# EAGLE board growth_panel (EAGLE 9.5.0)
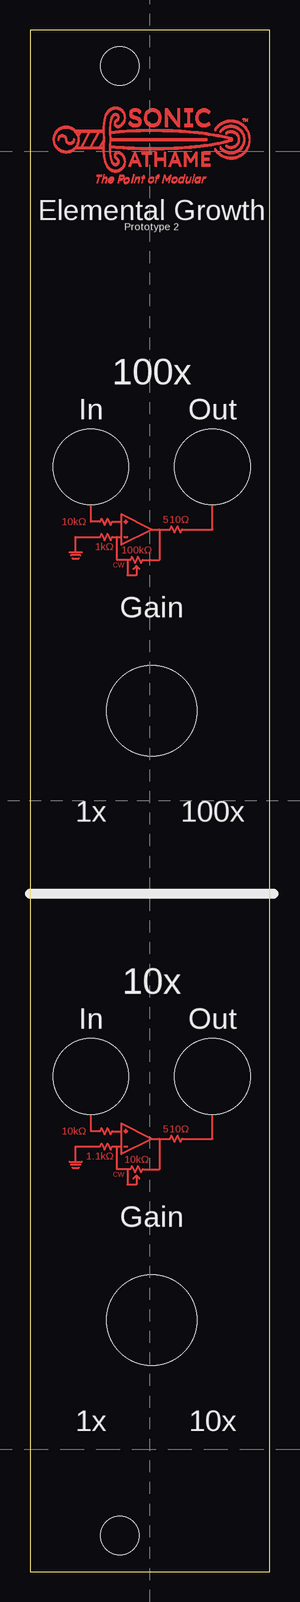
[diagram p0: board, top side]

Size 20 x 128.5 mm. Coordinates in mm from the lower left corner, seen from the top.
Copper layers (1*16): Top 0.035mm / dielectric 1.5mm / Bottom 0.035mm
Design rules "default": minimum track width 6mil, minimum drill 0.35mm, track to track 6mil, track to pad 6mil, pad to pad 6mil, via to via 6mil, smd to smd 6mil, copper to edge 40mil, drill to drill 6mil, minimum pad ring 10mil, minimum via ring 8mil, stop-mask expansion 4mil, vias tented up to drill 0mil, thermal gap 10mil

## Footprints (pad centres in the part's own frame; a part is rotated, then mirrored left to right if it is on the bottom)
PANEL_4U = hole 3.2: 7.5,3; 7.5,125.5
WQP-PJ398SM_PANEL = hole 6.3: 0,0
ALPHA_POT_VERTICAL_PANEL = hole 7.5: 0,0

## Placement (x,y rotation side)
U$1  [PANEL_4U]  0,0 0 top
U$2  [WQP-PJ398SM_PANEL]  5.08,92.08 0 top
U$3  [WQP-PJ398SM_PANEL]  15.24,92.08 0 top
U$4  [WQP-PJ398SM_PANEL]  5.08,41.27 0 top
U$5  [WQP-PJ398SM_PANEL]  15.24,41.27 0 top
U$6  [ALPHA_POT_VERTICAL_PANEL]  10.16,71.75 0 top
U$7  [ALPHA_POT_VERTICAL_PANEL]  10.16,20.95 0 top
U$8  [LOGO-65MIL-TPAD]  10.16,119.38 0 top

## Library data of the parts
U$1-U$8 = SonicAthame

## Tracks (layer width: path | path; a pad name or v marks a point on that pad's centre or on a via)
N$107
  Top 0.152: 5.08,90.04 5.08,87.5
N$108
  Top 0.152: 7.62,87.5 7.62,86.23
N$109
  Top 0.152: 5.97,87.76 6.22,87.25
N$110
  Top 0.152: 7.62,88.14 7.62,87.5
N$111
  Top 0.152: 10.16,86.87 7.62,88.14
N$112
  Top 0.152: 8.89,83.82 8.89,83.06
N$113
  Top 0.152: 12.06,86.61 12.32,87.12
N$114
  Top 0.152: 7.62,86.23 7.62,85.6
N$115
  Top 0.152: 7.62,85.6 10.16,86.87
N$116
  Top 0.152: 7.87,87.5 8.13,87.5
N$117
  Top 0.152: 11.68,86.87 11.81,87.12
N$118
  Top 0.152: 8.13,84.33 7.24,84.33
N$119
  Top 0.152: 8,87.38 8,87.63
N$120
  Top 0.152: 7.87,86.23 8.13,86.23
N$121
  Top 0.152: 3.3,84.96 3.81,84.96
N$122
  Top 0.152: 6.73,87.25 6.86,87.5
N$123
  Top 0.152: 8.38,84.33 8.13,84.33
N$124
  Top 0.152: 3.81,84.96 4.32,84.96
N$125
  Top 0.152: 4.19,84.71 3.43,84.71
N$126
  Top 0.152: 11.81,87.12 12.06,86.61
N$127
  Top 0.152: 3.56,84.45 4.06,84.45
N$128
  Top 0.152: 5.84,86.23 5.97,86.49
N$129
  Top 0.152: 5.97,86.49 6.22,85.98
N$130
  Top 0.152: 6.22,85.98 6.48,86.49
N$131
  Top 0.152: 3.81,84.96 3.81,86.23
N$132
  Top 0.152: 6.48,86.49 6.73,85.98
N$133
  Top 0.152: 6.73,85.98 6.86,86.23
N$134
  Top 0.152: 5.84,87.5 5.97,87.76
N$135
  Top 0.152: 6.22,87.25 6.48,87.76
N$136
  Top 0.152: 6.48,87.76 6.73,87.25
N$137
  Top 0.152: 5.84,87.5 5.08,87.5
N$138
  Top 0.152: 9.4,84.33 10.79,84.33
N$139
  Top 0.152: 6.86,87.5 7.62,87.5
N$140
  Top 0.152: 12.32,87.12 12.57,86.61
N$141
  Top 0.152: 12.57,86.61 12.7,86.87
N$142
  Top 0.152: 8.38,84.33 8.51,84.58
N$143
  Top 0.152: 8.51,84.58 8.76,84.07
N$144
  Top 0.152: 8.13,83.06 8.89,83.06
N$145
  Top 0.152: 8.76,84.07 9.02,84.58
N$146
  Top 0.152: 9.02,84.58 9.27,84.07
N$147
  Top 0.152: 8.89,83.82 8.64,83.57
N$148
  Top 0.152: 9.27,84.07 9.4,84.33
N$149
  Top 0.152: 7.24,86.23 7.24,84.33
N$150
  Top 0.152: 10.16,86.87 10.79,86.87
N$151
  Top 0.152: 7.24,86.23 7.62,86.23
N$152
  Top 0.152: 10.79,86.87 11.68,86.87
N$153
  Top 0.152: 12.7,86.87 15.24,86.87
N$154
  Top 0.152: 15.24,86.87 15.24,90.04
N$155
  Top 0.152: 10.79,86.87 10.79,84.33
N$156
  Top 0.152: 8.89,83.82 9.14,83.57
N$157
  Top 0.152: 6.86,86.23 7.24,86.23
N$158
  Top 0.152: 3.81,86.23 5.84,86.23
N$159
  Top 0.152: 8.13,84.33 8.13,83.06
N$160
  Top 0.152: 5.08,39.24 5.08,36.7
N$161
  Top 0.152: 7.62,35.43 7.62,34.8
N$162
  Top 0.152: 7.87,36.7 8.13,36.7
N$163
  Top 0.152: 7.62,37.34 7.62,36.7
N$164
  Top 0.152: 8.13,33.53 7.24,33.53
N$165
  Top 0.152: 7.62,36.7 7.62,35.43
N$166
  Top 0.152: 7.62,34.8 10.16,36.07
N$167
  Top 0.152: 10.16,36.07 7.62,37.34
N$168
  Top 0.152: 9.4,33.53 10.79,33.53
N$169
  Top 0.152: 8,36.58 8,36.83
N$170
  Top 0.152: 7.87,35.43 8.13,35.43
N$171
  Top 0.152: 3.3,34.16 3.81,34.16
N$172
  Top 0.152: 8.51,33.78 8.76,33.27
N$173
  Top 0.152: 3.81,34.16 4.32,34.16
N$174
  Top 0.152: 4.19,33.91 3.43,33.91
N$175
  Top 0.152: 3.56,33.66 4.06,33.66
N$176
  Top 0.152: 5.84,35.43 5.97,35.69
N$177
  Top 0.152: 5.97,35.69 6.22,35.18
N$178
  Top 0.152: 6.22,35.18 6.48,35.69
N$179
  Top 0.152: 6.48,35.69 6.73,35.18
N$180
  Top 0.152: 6.73,35.18 6.86,35.43
N$181
  Top 0.152: 5.84,36.7 5.97,36.96
N$182
  Top 0.152: 3.81,34.16 3.81,35.43
N$183
  Top 0.152: 5.97,36.96 6.22,36.45
N$184
  Top 0.152: 6.86,36.7 7.62,36.7
N$185
  Top 0.152: 6.22,36.45 6.48,36.96
N$186
  Top 0.152: 6.73,36.45 6.86,36.7
N$187
  Top 0.152: 6.48,36.96 6.73,36.45
N$188
  Top 0.152: 7.24,35.43 7.24,33.53
N$189
  Top 0.152: 5.84,36.7 5.08,36.7
N$190
  Top 0.152: 11.68,36.07 11.81,36.32
N$191
  Top 0.152: 11.81,36.32 12.06,35.81
N$192
  Top 0.152: 12.06,35.81 12.32,36.32
N$193
  Top 0.152: 12.32,36.32 12.57,35.81
N$194
  Top 0.152: 12.57,35.81 12.7,36.07
N$195
  Top 0.152: 8.38,33.53 8.51,33.78
N$196
  Top 0.152: 8.76,33.27 9.02,33.78
N$197
  Top 0.152: 9.02,33.78 9.27,33.27
N$198
  Top 0.152: 8.13,33.53 8.13,32.26
N$199
  Top 0.152: 9.27,33.27 9.4,33.53
N$200
  Top 0.152: 10.16,36.07 10.79,36.07
N$201
  Top 0.152: 8.13,32.26 8.89,32.26
N$202
  Top 0.152: 10.79,36.07 11.68,36.07
N$203
  Top 0.152: 12.7,36.07 15.24,36.07
N$204
  Top 0.152: 15.24,36.07 15.24,39.24
N$205
  Top 0.152: 10.79,36.07 10.79,33.53
N$206
  Top 0.152: 8.89,33.02 9.14,32.77
N$207
  Top 0.152: 8.89,33.02 8.64,32.77
N$208
  Top 0.152: 8.89,33.02 8.89,32.26
N$209
  Top 0.152: 8.38,33.53 8.13,33.53
N$210
  Top 0.152: 6.86,35.43 7.24,35.43
N$211
  Top 0.152: 3.81,35.43 5.84,35.43
N$212
  Top 0.152: 7.24,35.43 7.62,35.43

## Text on the board
Top: 10kΩ | 510Ω | 1kΩ | 100kΩ | CW | 10kΩ | 510Ω | 1.1kΩ | 10kΩ | CW
tNames: Elemental Growth | Prototype 2 | 100x | In | Out | Gain | 1x | 100x | 10x | In | Out | Gain | 1x | 10x
tStop: 10kΩ | 510Ω | 1kΩ | 100kΩ | CW | 10kΩ | 510Ω | 1.1kΩ | 10kΩ | CW